# EAGLE board Diseño_de_FISICA_v17 (EAGLE 9.7.0)

Size 131.04 x 80.95 mm. Coordinates in mm from the lower left corner, seen from the top.
Outline: 0.51,0.51 131.04,0 131.04,80.95 0,80.7 0.51,0.51
Copper layers (1*16): Top / Bottom
Stack-up Default Layer Stack: Top User Defined 0.035mm / Dielectric-1 User Defined 1.5mm / Bottom User Defined 0.035mm
Design rules "default": minimum track width 6mil, minimum drill 0.35mm, track to track 6mil, track to pad 6mil, pad to pad 6mil, via to via 6mil, smd to smd 6mil, copper to edge 40mil, drill to drill 6mil, minimum pad ring 10mil, minimum via ring 8mil, stop-mask expansion 4mil, vias tented up to drill 0mil, thermal gap 10mil

## Footprints (pad centres in the part's own frame; a part is rotated, then mirrored left to right if it is on the bottom)
1X03 = drill 1.016 long: 1 -2.54,0; 2 0,0; 3 2.54,0
1X08 = drill 1.016 long: 1 -8.89,0; 2 -6.35,0; 3 -3.81,0; 4 -1.27,0; 5 1.27,0; 6 3.81,0; 7 6.35,0; 8 8.89,0
MEGAOUTLINE = drill 0.8: 0 12.7,24.13; 1 10.16,24.13; 2 7.62,24.13; 3 5.08,24.13; 3V3 -15.24,-24.13; 4 2.54,24.13; 5 0,24.13; 5V -12.7,-24.13; 6 -2.54,24.13; 7 -5.08,24.13; 8 -8.89,24.13; 9 -11.43,24.13; 10 -13.97,24.13; 11 -16.51,24.13; 12 -19.05,24.13; 13 -21.59,24.13; 14 17.78,24.13; 15 20.32,24.13; 16 22.86,24.13; 17 25.4,24.13; 18 27.94,24.13; 19 30.48,24.13; 20 33.02,24.13; 21 35.56,24.13; 22 43.18,21.59; 23 45.72,21.59; 24 43.18,19.05; 25 45.72,19.05; 26 43.18,16.51; 27 45.72,16.51; 28 43.18,13.97; 29 45.72,13.97; 30 43.18,11.43; 31 45.72,11.43; 32 43.18,8.89; 33 45.72,8.89; 34 43.18,6.35; 35 45.72,6.35; 36 43.18,3.81; 37 45.72,3.81; 38 43.18,1.27; 39 45.72,1.27; 40 43.18,-1.27; 41 45.72,-1.27; 42 43.18,-3.81; 43 45.72,-3.81; 44 43.18,-6.35; 45 45.72,-6.35; 46 43.18,-8.89; 47 45.72,-8.89; 48 43.18,-11.43; 49 45.72,-11.43; 50 43.18,-13.97; 51 45.72,-13.97; 52 43.18,-16.51; 53 45.72,-16.51; A0 0,-24.13; A1 2.54,-24.13; A2 5.08,-24.13; A3 7.62,-24.13; A4 10.16,-24.13; A5 12.7,-24.13; A6 15.24,-24.13; A7 17.78,-24.13; A8 22.86,-24.13; A9 25.4,-24.13; A10 27.94,-24.13; A11 30.48,-24.13; A12 33.02,-24.13; A13 35.56,-24.13; A14 38.1,-24.13; A15 40.64,-24.13; AREF -26.67,24.13; GND@1 -24.13,24.13; GND@2 -10.16,-24.13; GND@3 -7.62,-24.13; GND@4 43.18,24.13; GND@5 45.72,24.13; GND@6 43.18,-19.05; GND@7 45.72,-19.05; RESET -17.78,-24.13; VIN -5.08,-24.13
DRV8825 = drill 1.016: 1 -6.35,8.89; 2 -6.35,6.35; 3 -6.35,3.81; 4 -6.35,1.27; 5 -6.35,-1.27; 6 -6.35,-3.81; 7 -6.35,-6.35; 8 -6.35,-8.89; 9 6.35,-8.89; 10 6.35,-6.35; 11 6.35,-3.81; 12 6.35,-1.27; 13 6.35,1.27; 14 6.35,3.81; 15 6.35,6.35; 16 6.35,8.89
B2B-XH-A = drill 0.64: 1 0,0; 2 2.5,0
1X1-BIGPOGO = drill 1.4 pad 2.54 long: P$1 0,0
LEDRD254W60D565H860B = drill 0.981 pad 1.581: 1 -1.27,0; 2 1.27,0
ENC28J60 = drill 1.016 octagon: CLK 1.27,2.54; CS 1.27,-5.08; GND 3.81,-7.62; NT 3.81,2.54; RST 3.81,-5.08; SCK 3.81,-2.54; SI 1.27,-2.54; SO 3.81,0; VCC 1.27,-7.62; WOL 1.27,0
1X04 = drill 1.016 long: 1 -3.81,0; 2 -1.27,0; 3 1.27,0; 4 3.81,0
RESC2012X65 = smd 1.031 x 1.42: 1 -0.919,0; 2 0.919,0

## Placement (x,y rotation side)
3-3VCC  PINHD-1X3  [1X03]  33.53,11.43 180 top
5_VCC  PINHD-1X3  [1X03]  41.4,11.53 0 top
ANALOG_1  PINHD-1X8  [1X08]  65.28,11.18 0 top
ANALOG_2  PINHD-1X8  [1X08]  88.14,11.18 0 top
ARDUINOMEGA2560  MEGA_DEVICE  [MEGAOUTLINE]  56.39,42.93 0 top
GND  PINHD-1X3  [1X03]  25.65,11.43 180 top
GPIO_DIG  PINHD-1X8  [1X08]  111,50.29 270 top
GPIO_DIG2  PINHD-1X8  [1X08]  115.32,50.04 270 top
IC1  2133-DRV8825  [DRV8825]  61.98,55.88 270 top
IC2  2133-DRV8825  [DRV8825]  85.09,55.63 270 top
IC3  2133-DRV8825  [DRV8825]  37.34,55.88 270 top
J2  3A/250V  [B2B-XH-A]  11.43,20.07 0 top
JP1  [1X1-BIGPOGO]  8.38,28.45 90 top
JP2  [1X1-BIGPOGO]  20.07,28.45 90 top
JP3  [1X1-BIGPOGO]  13.97,28.45 90 top
LED_AUX  LED_RED  [LEDRD254W60D565H860B]  66.55,27.43 90 top
LED_MOT1  LED_RED  [LEDRD254W60D565H860B]  43.69,27.43 90 top
LED_MOT2  LED_RED  [LEDRD254W60D565H860B]  51.31,27.43 90 top
LED_MOT3  LED_RED  [LEDRD254W60D565H860B]  58.93,27.43 90 top
LED_ON  LED_RED  [LEDRD254W60D565H860B]  50.29,10.16 180 top
LED_SERV1  LED_RED  [LEDRD254W60D565H860B]  28.45,27.43 90 top
LED_SERV2  LED_RED  [LEDRD254W60D565H860B]  36.07,27.43 90 top
MODULO_ETHERNET  ENC28J60  [ENC28J60]  12.45,36.07 90 top
MOTOR_1  PINHD-1X4  [1X04]  43.69,38.86 90 top
MOTOR_2  PINHD-1X4  [1X04]  51.31,38.86 90 top
MOTOR_3  PINHD-1X4  [1X04]  58.93,38.86 90 top
MOTOR_4  PINHD-1X4  [1X04]  64.77,74.42 180 top
R1  [RESC2012X65]  49.78,14.22 0 top
R2  [RESC2012X65]  28.45,32.26 270 top
R3  [RESC2012X65]  36.07,32.26 270 top
R4  [RESC2012X65]  58.93,32.26 270 top
R5  [RESC2012X65]  51.31,32.26 270 top
R6  [RESC2012X65]  43.69,32.26 270 top
R7  [RESC2012X65]  66.55,32.26 270 top
RELAYS  PINHD-1X4  [1X04]  66.55,38.86 90 top
SERV_1  PINHD-1X3  [1X03]  28.45,39.88 270 top
SERV_2  PINHD-1X3  [1X03]  36.07,39.88 90 top
UART_1  PINHD-1X3  [1X03]  76.71,74.42 0 top
UART_2  PINHD-1X3  [1X03]  84.58,74.42 0 top

## Library data of the parts
3-3VCC 5_VCC ANALOG_1 ANALOG_2 GND GPIO_DIG GPIO_DIG2 MOTOR_1-MOTOR_4 RELAYS SERV_1 SERV_2 UART_1 UART_2 = Connector; CATEGORY: CONNECTOR; SUB-CATEGORY: PIN-HEADER
ARDUINOMEGA2560 = ArduinoMegaOutline
IC1-IC3 = pololu-stepper-driver
J2 = Connector; CATEGORY: CONNECTOR; DESCRIPTION: 2.5mm pitch/disconnectable crimp style connector; MANUFACTURER: JST (XH CONNECTOR); MPN: B2B-XH-A; OPERATING_TEMPERATURE: -25°C ~ 85°C; PART_STATUS: ACTIVE; ROHS_COMPLIANT: COMPLIANT; SERIES: B_B-XH-A; SUB_CATEGORY: Through hole connector; TYPE: top entry
JP1-JP3 = adafruit
LED_AUX LED_MOT1-LED_MOT3 LED_ON LED_SERV1 LED_SERV2 = Opto-Electronic; CATEGORY: Opto-Electronic; SUB-CATEGORY: LED
MODULO_ETHERNET = ethernet-mikroavr
R1-R7 = Resistor; CATEGORY: Resistor; SUB-CATEGORY: Fixed

## Nets
A0: ANALOG_1.1 ARDUINOMEGA2560.A0
A1: ANALOG_1.2 ARDUINOMEGA2560.A1
A2: ANALOG_1.3 ARDUINOMEGA2560.A2
A3: ANALOG_1.4 ARDUINOMEGA2560.A3
A4: ANALOG_1.5 ARDUINOMEGA2560.A4
A5: ANALOG_1.6 ARDUINOMEGA2560.A5
A6: ANALOG_1.7 ARDUINOMEGA2560.A6
A7: ANALOG_1.8 ARDUINOMEGA2560.A7
A8: ANALOG_2.1 ARDUINOMEGA2560.A8
A9: ANALOG_2.2 ARDUINOMEGA2560.A9
A10: ANALOG_2.3 ARDUINOMEGA2560.A10
A11: ANALOG_2.4 ARDUINOMEGA2560.A11
A12: ANALOG_2.5 ARDUINOMEGA2560.A12
A13: ANALOG_2.6 ARDUINOMEGA2560.A13
A14: ANALOG_2.7 ARDUINOMEGA2560.A14
A15: ANALOG_2.8 ARDUINOMEGA2560.A15
AREF: ARDUINOMEGA2560.AREF MOTOR_4.4
CLK: ARDUINOMEGA2560.49 MODULO_ETHERNET.CLK
CS: ARDUINOMEGA2560.53 MODULO_ETHERNET.CS
D2: ARDUINOMEGA2560.2
D3: ARDUINOMEGA2560.3
D4: ARDUINOMEGA2560.4
D5: ARDUINOMEGA2560.5
D20: ARDUINOMEGA2560.20 GPIO_DIG2.7
D21: ARDUINOMEGA2560.21 GPIO_DIG2.8
D28: ARDUINOMEGA2560.28 RELAYS.1
D29: ARDUINOMEGA2560.29 RELAYS.2
D30: ARDUINOMEGA2560.30 RELAYS.3
D31: ARDUINOMEGA2560.31 RELAYS.4
D32: ARDUINOMEGA2560.32 GPIO_DIG.1
D33: ARDUINOMEGA2560.33 GPIO_DIG.2
D34: ARDUINOMEGA2560.34 GPIO_DIG.3
D35: ARDUINOMEGA2560.35 GPIO_DIG.4
D36: ARDUINOMEGA2560.36 GPIO_DIG.5
D37: ARDUINOMEGA2560.37 GPIO_DIG.6
D38: ARDUINOMEGA2560.38 GPIO_DIG.7
D39: ARDUINOMEGA2560.39 GPIO_DIG.8
D40: ARDUINOMEGA2560.40 GPIO_DIG2.1
D41: ARDUINOMEGA2560.41 GPIO_DIG2.2
D42: ARDUINOMEGA2560.42 GPIO_DIG2.3
D43: ARDUINOMEGA2560.43 GPIO_DIG2.4
D44: ARDUINOMEGA2560.44 GPIO_DIG2.5
D45: ARDUINOMEGA2560.45 GPIO_DIG2.6
DIR_1: ARDUINOMEGA2560.23 IC1.8
DIR_2: ARDUINOMEGA2560.25 IC2.8
DIR_3: ARDUINOMEGA2560.27 IC3.8
GND: ARDUINOMEGA2560.GND@1 ARDUINOMEGA2560.GND@2 ARDUINOMEGA2560.GND@3 ARDUINOMEGA2560.GND@4 ARDUINOMEGA2560.GND@5 ARDUINOMEGA2560.GND@6 ARDUINOMEGA2560.GND@7 GND.1 GND.2 GND.3 IC1.15 IC2.15 IC3.15 J2.2 JP3.P$1 MODULO_ETHERNET.GND R1.1 R2.1 R3.1 R4.1 R5.1 R6.1 R7.1 SERV_1.3 SERV_2.1
GND1: IC1.9 IC2.9 IC3.9
LED_AUX: ARDUINOMEGA2560.11 LED_AUX.1
LED_MOT_1: ARDUINOMEGA2560.8 LED_MOT1.1
LED_MOT_2: ARDUINOMEGA2560.9 LED_MOT2.1
LED_MOT_3: ARDUINOMEGA2560.10 LED_MOT3.1
LED_SERV_1: ARDUINOMEGA2560.12 LED_SERV1.1
LED_SERV_2: ARDUINOMEGA2560.13 LED_SERV2.1
MOT1_A1: IC1.12 MOTOR_1.3
MOT1_A2: IC1.11 MOTOR_1.4
MOT1_B1: IC1.13 MOTOR_1.2
MOT1_B2: IC1.14 MOTOR_1.1
MOT2_A1: IC2.12 MOTOR_2.3
MOT2_A2: IC2.11 MOTOR_2.4
MOT2_B1: IC2.13 MOTOR_2.2
MOT2_B2: IC2.14 MOTOR_2.1
MOT3_A1: IC3.12 MOTOR_3.3
MOT3_A2: IC3.11 MOTOR_3.4
MOT3_B1: IC3.13 MOTOR_3.2
MOT3_B2: IC3.14 MOTOR_3.1
N$7: IC2.5 IC2.6
N$8: IC1.5 IC1.6
N$9: IC3.5 IC3.6
N$20: LED_ON.2 R1.2
N$21: LED_SERV1.2 R2.2
N$22: LED_SERV2.2 R3.2
N$23: LED_MOT3.2 R4.2
N$24: LED_MOT2.2 R5.2
N$25: LED_MOT1.2 R6.2
N$37: LED_AUX.2 R7.2
NT: ARDUINOMEGA2560.46 MODULO_ETHERNET.NT
PWM_SERV_1: ARDUINOMEGA2560.6 SERV_1.1
PWM_SERV_2: ARDUINOMEGA2560.7 SERV_2.3
RST: ARDUINOMEGA2560.RESET MOTOR_4.3
RST_1: ARDUINOMEGA2560.48 MODULO_ETHERNET.RST
RX: ARDUINOMEGA2560.0 MOTOR_4.2
RX_1: ARDUINOMEGA2560.19 UART_2.3
RX_2: ARDUINOMEGA2560.17 UART_2.1
RX_3: ARDUINOMEGA2560.15 UART_1.2
SCK: ARDUINOMEGA2560.52 MODULO_ETHERNET.SCK
SI: ARDUINOMEGA2560.51 MODULO_ETHERNET.SI
SO: ARDUINOMEGA2560.50 MODULO_ETHERNET.SO
STEP_1: ARDUINOMEGA2560.22 IC1.7
STEP_2: ARDUINOMEGA2560.24 IC2.7
STEP_3: ARDUINOMEGA2560.26 IC3.7
TX: ARDUINOMEGA2560.1 MOTOR_4.1
TX_1: ARDUINOMEGA2560.18 UART_2.2
TX_2: ARDUINOMEGA2560.16 UART_1.3
TX_3: ARDUINOMEGA2560.14 UART_1.1
VCC: J2.1 JP1.P$1 SERV_1.2 SERV_2.2
VCC_3_3: 3-3VCC.1 3-3VCC.2 3-3VCC.3 ARDUINOMEGA2560.3V3 MODULO_ETHERNET.VCC
VCC_5: 5_VCC.1 5_VCC.2 5_VCC.3 ARDUINOMEGA2560.5V JP2.P$1 LED_ON.1
VCC_MOT: IC1.16 IC2.16 IC3.16
VIN_1: ARDUINOMEGA2560.VIN
WOL: ARDUINOMEGA2560.47 MODULO_ETHERNET.WOL

## Tracks (layer width: path | path; a pad name or v marks a point on that pad's centre or on a via)
A0  (1 unrouted)
A1  (1 unrouted)
A2  (1 unrouted)
A3  (1 unrouted)
A4  (1 unrouted)
A5  (1 unrouted)
A6  (1 unrouted)
A7  (1 unrouted)
A8  (1 unrouted)
A9  (1 unrouted)
A10  (1 unrouted)
A11  (1 unrouted)
A12  (1 unrouted)
A13  (1 unrouted)
A14  (1 unrouted)
A15  (1 unrouted)
AREF  (1 unrouted)
CLK  (1 unrouted)
CS  (1 unrouted)
D20  (1 unrouted)
D21  (1 unrouted)
D28  (1 unrouted)
D29  (1 unrouted)
D30  (1 unrouted)
D31  (1 unrouted)
D32  (1 unrouted)
D33  (1 unrouted)
D34  (1 unrouted)
D35  (1 unrouted)
D36  (1 unrouted)
D37  (1 unrouted)
D38  (1 unrouted)
D39  (1 unrouted)
D40  (1 unrouted)
D41  (1 unrouted)
D42  (1 unrouted)
D43  (1 unrouted)
D44  (1 unrouted)
D45  (1 unrouted)
DIR_1  (1 unrouted)
DIR_2  (1 unrouted)
DIR_3  (1 unrouted)
GND  (24 unrouted)
GND1  (2 unrouted)
LED_AUX  (1 unrouted)
LED_MOT_1  (1 unrouted)
LED_MOT_2  (1 unrouted)
LED_MOT_3  (1 unrouted)
LED_SERV_1  (1 unrouted)
LED_SERV_2  (1 unrouted)
MOT1_A1  (1 unrouted)
MOT1_A2  (1 unrouted)
MOT1_B1  (1 unrouted)
MOT1_B2  (1 unrouted)
MOT2_A1  (1 unrouted)
MOT2_A2  (1 unrouted)
MOT2_B1  (1 unrouted)
MOT2_B2  (1 unrouted)
MOT3_A1  (1 unrouted)
MOT3_A2  (1 unrouted)
MOT3_B1  (1 unrouted)
MOT3_B2  (1 unrouted)
N$7  (1 unrouted)
N$8  (1 unrouted)
N$9  (1 unrouted)
N$20  (1 unrouted)
N$21  (1 unrouted)
N$22  (1 unrouted)
N$23  (1 unrouted)
N$24  (1 unrouted)
N$25  (1 unrouted)
N$37  (1 unrouted)
NT  (1 unrouted)
PWM_SERV_1  (1 unrouted)
PWM_SERV_2  (1 unrouted)
RST  (1 unrouted)
RST_1  (1 unrouted)
RX  (1 unrouted)
RX_1  (1 unrouted)
RX_2  (1 unrouted)
RX_3  (1 unrouted)
SCK  (1 unrouted)
SI  (1 unrouted)
SO  (1 unrouted)
STEP_1  (1 unrouted)
STEP_2  (1 unrouted)
STEP_3  (1 unrouted)
TX  (1 unrouted)
TX_1  (1 unrouted)
TX_2  (1 unrouted)
TX_3  (1 unrouted)
VCC  (3 unrouted)
VCC_3_3  (4 unrouted)
VCC_5  (5 unrouted)
VCC_MOT  (2 unrouted)
WOL  (1 unrouted)